# Altium PCB Tony's+Brew+Helper+2.0_PCB.pcbdoc
Units mil, origin at the board's own origin, x right, y up, seen from the top; angles counter-clockwise.
Board outline 176058.21 x 177280.51 mil, 2 copper layers (Top Layer, Bottom Layer); 78 components, 84 nets, 250 pads, 38 vias.
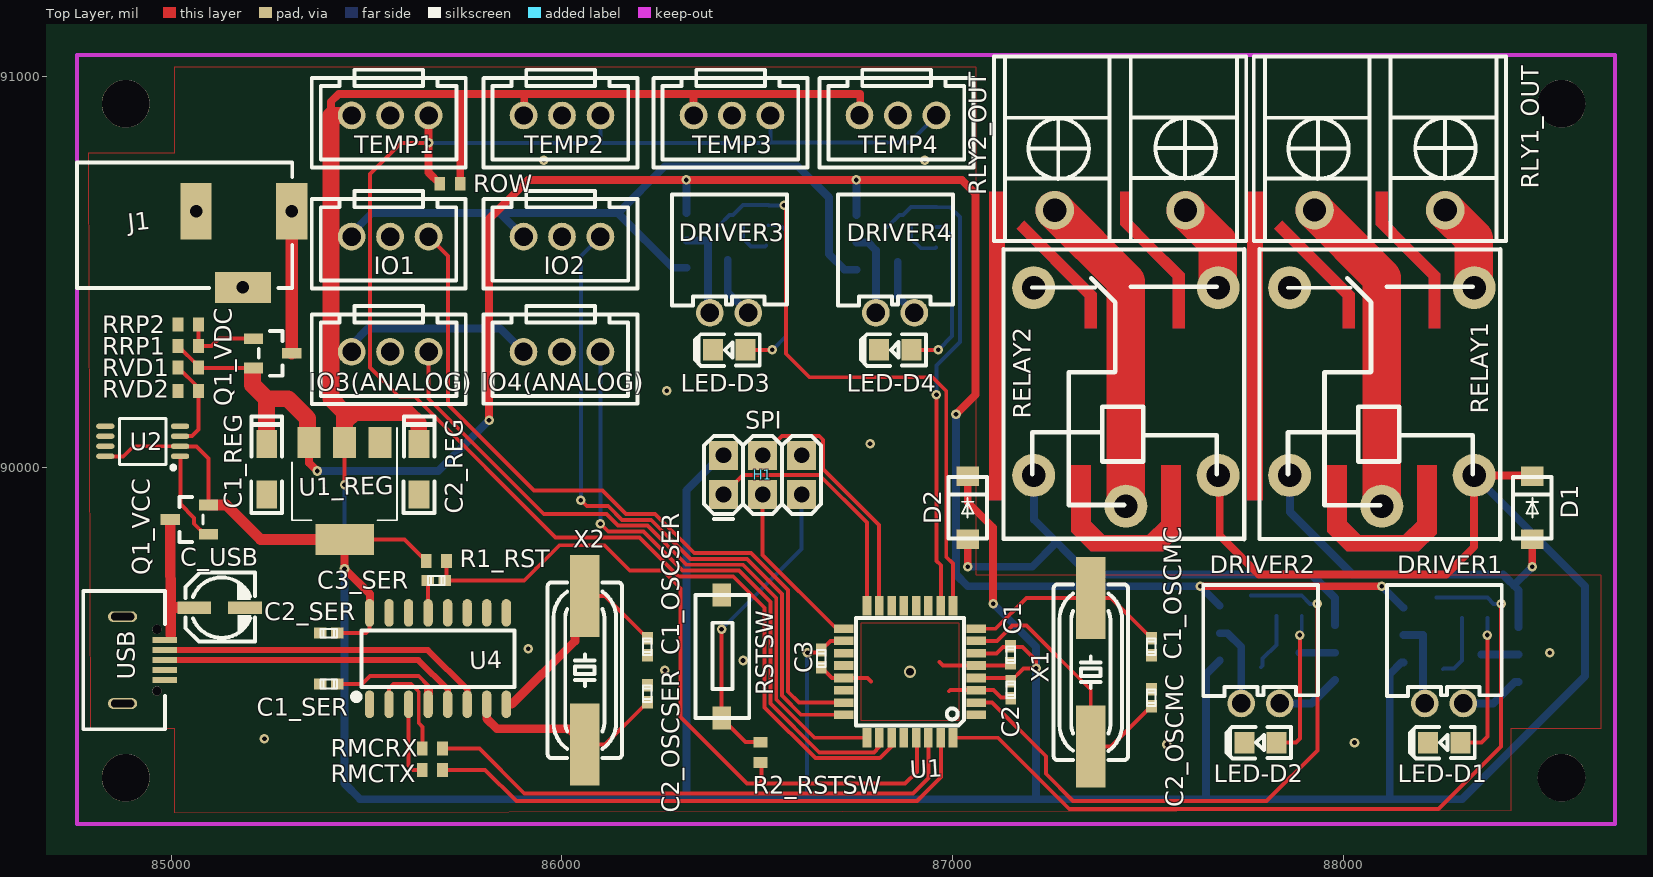
[diagram p0: Top Layer view]
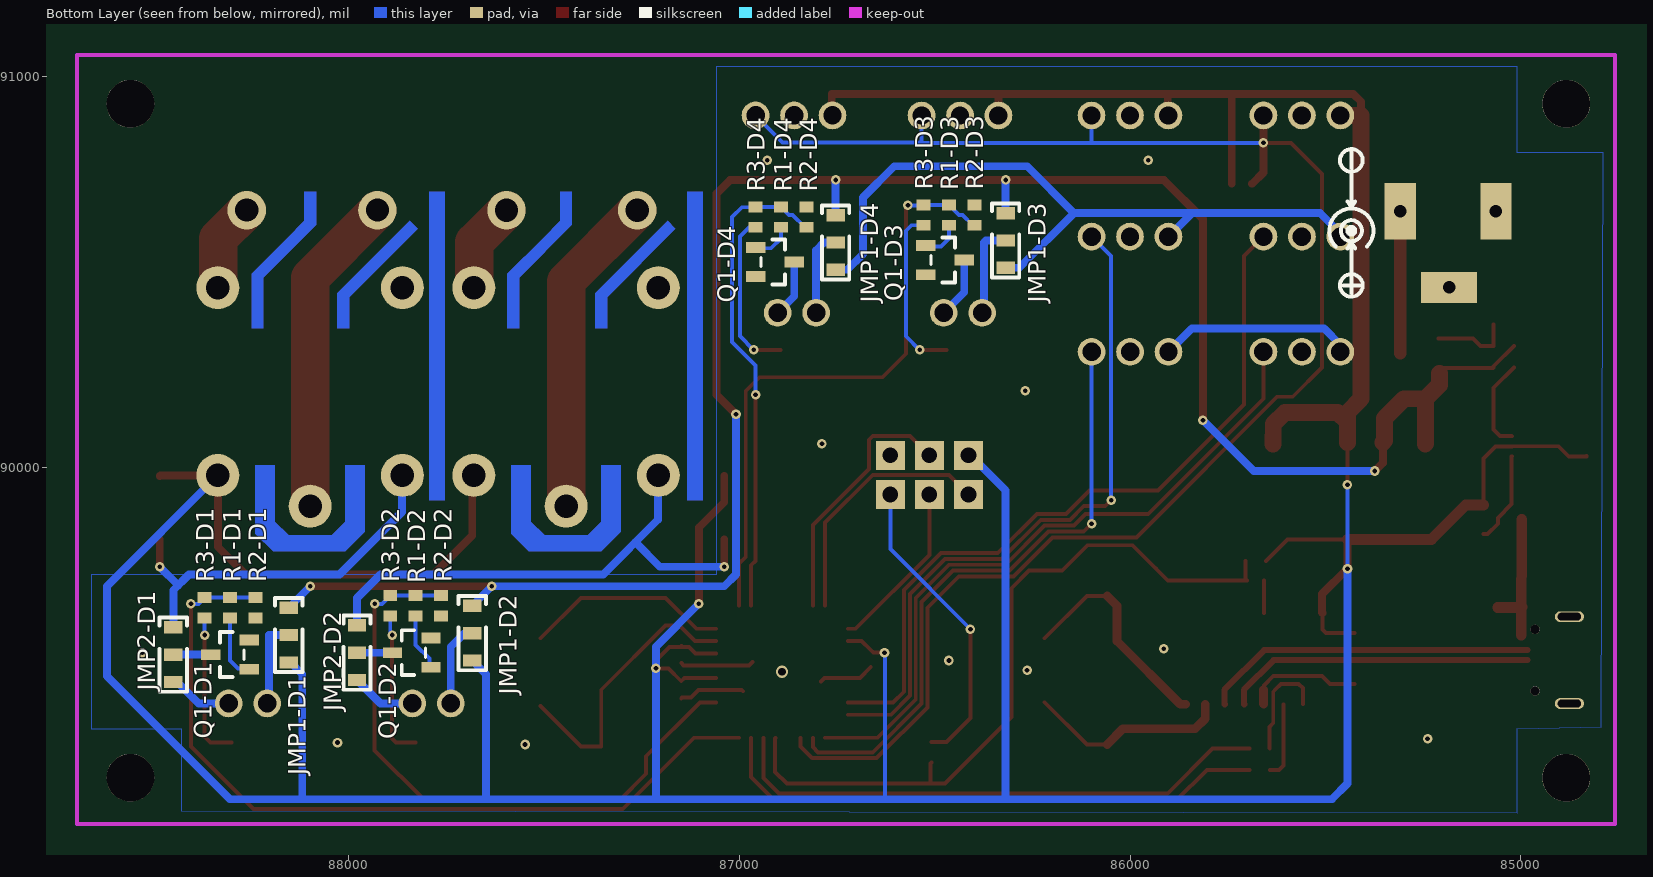
[diagram p1: Bottom Layer view, seen from below]

## Layer stack, top to bottom
Top Layer: signal copper (thickness not stored)
Dielectric: dielectric 12.6, FR-4, Dk 4.8
Bottom Layer: signal copper (thickness not stored)

## Board outline
177058.21,1000 1000,1000 1000,178280.51 177058.21,178280.51

## Components (designator, comment, footprint, x,y, rotation, side; value= is the part's Value field where it differs from the comment)
C1 "100n" 0402-CAP 87148.99,89520.36 r90 top
C1_OSCMC "22p" 0402-CAP 87508.99,89540.36 r90 top
C1_OSCSER "22p" 0402-CAP 86218.99,89540.36 r90 top
C1_REG "10u" CASE-A_3216#1 85243.99,89990.36 r90 top
C1_SER "10n" 0402-CAP 85403.99,89445.36 r0 top
C2 "100n" 0402-CAP 87149.07,89430.3 r90 top
C2_OSCMC "22p" 0402-CAP 87508.99,89410.36 r270 top
C2_OSCSER "22p" 0402-CAP 86219.07,89420.3 r270 top
C2_REG "22u" CASE-A_3216#2 85633.91,89990.42 r90 top
C2_SER "100n" 0402-CAP 85403.99,89575.36 r0 top
C3 "100n" 0402-CAP 86664.07,89510.3 r90 top
C3_SER "100n" 0402-CAP 85679.07,89710.3 r180 top
C_USB "10u" CAP-D4.0XH5.5 85059.47,89640.64 r180 top
D1 "M1" SMA(DO-214AC) 88484.07,89900.3 r90 top
D2 "M1" SMA(DO-214AC) 87038.99,89900.36 r90 top
DRIVER1 "AUX Driver 1" XH-2AW 88308.99,89495.36 r0 top
DRIVER2 "AUX Driver 2" XH-2AW 87838.99,89495.36 r0 top
DRIVER3 "AUX Driver 3" XH-2AW 86479.07,90495.3 r0 top
DRIVER4 "AUX Driver 4" XH-2AW 86903.99,90495.36 r0 top
H1 "SPI" 2X3 86413.99,89930.36 r0 top
IO1 "XHB-3A" XHB-3A 85558.99,90590.36 r180 top
IO2 "XHB-3A" XHB-3A 85999.07,90590.3 r180 top
IO3(ANALOG) "XHB-3A" XHB-3A 85559.07,90295.3 r180 top
IO4(ANALOG) "XHB-3A" XHB-3A 85998.99,90295.36 r180 top
J1 "DC-005" DCJ3P-14.2X11.0X9.0MM 85184.07,90655.3 r0 top
JMP1-D1 "AUX1 VCC - 12V" JMP-3-NO-0805 88153.99,89605.36 r90 bottom
JMP1-D2 "AUX2 VCC - 12V" JMP-3-NO-0805 87684.07,89610.3 r90 bottom
JMP1-D3 "AUX3 VCC - 12V" JMP-3-NO-0805 86318.99,90615.36 r90 bottom
JMP1-D4 "AUX4 VCC - 12V" JMP-3-NO-0805 86754.07,90610.3 r90 bottom
JMP2-D1 "AUX - RLY" JMP-3-NO-0805 88449.07,89555.3 r90 bottom
JMP2-D2 "AUX - RLY" JMP-3-NO-0805 87978.99,89560.36 r90 bottom
LED-D1 "17-21/BHC-XL2M2TY/3T" LED-0805 88258.99,89295.36 r0 top
LED-D2 "17-21/BHC-XL2M2TY/3T" LED-0805 87788.99,89295.36 r0 top
LED-D3 "17-21/BHC-XL2M2TY/3T" LED-0805 86429.07,90300.3 r0 top
LED-D4 "17-21/BHC-XL2M2TY/3T" LED-0805 86853.99,90300.36 r0 top
Q1-D1 "AO3404A" SOT-23(SOT-23-3)#1 88354.07,89520.3 r270 bottom
Q1-D2 "AO3404A" SOT-23(SOT-23-3)#1 87888.99,89525.36 r270 bottom
Q1-D3 "AO3404A" SOT-23(SOT-23-3)#1 86424.07,90530.3 r90 bottom
Q1-D4 "AO3404A" SOT-23(SOT-23-3)#1 86859.07,90525.3 r90 bottom
Q1_VCC "SI2301" SOT-23(SOT-23-3)#2 84996.87,89865.99 r90 top
Q1_VDC "AO3401" SOT-23(SOT-23-3)#3 85309.86,90291.66 r270 top
R1-D1 "100k" 0402-RES#1 88304.07,89640.3 r90 bottom
R1-D2 "100k" 0402-RES#1 87828.99,89645.36 r90 bottom
R1-D3 "100k" 0402-RES#1 86464.07,90645.3 r90 bottom
R1-D4 "100k" 0402-RES#1 86893.99,90640.36 r90 bottom
R1_RST "10k" 0402-RES#2 85678.99,89760.36 r180 top
R2-D1 "100k" 0402-RES#1 88239.07,89640.3 r90 bottom
R2-D2 "100k" 0402-RES#1 87763.99,89645.36 r90 bottom
R2-D3 "100k" 0402-RES#1 86398.99,90645.36 r270 bottom
R2-D4 "100k" 0402-RES#1 86828.99,90640.36 r270 bottom
R2_RSTSW "330R" 0402-RES#2 86508.99,89270.37 r90 top
R3-D1 "470R" 0402-RES#1 88368.99,89640.36 r90 bottom
R3-D2 "470R" 0402-RES#1 87893.99,89645.36 r90 bottom
R3-D3 "470R" 0402-RES#1 86528.99,90645.36 r90 bottom
R3-D4 "470R" 0402-RES#1 86958.99,90640.36 r90 bottom
RELAY1 "SRD-05VDC-SL-C00" RELAY-SL-SRD 88098.99,89900.36 r90 top
RELAY2 "SRD-05VDC-SL-C00" RELAY-SL-SRD 87443.91,89900.42 r90 top
RLY1_OUT "WJ8500-8.50-2P-14" WJ8500-8.50-2P-14 88093.99,90815.36 r0 top
RLY2_OUT "WJ8500-8.50-2P-14" WJ8500-8.50-2P-14 87429.07,90815.3 r0 top
RMCRX "1k" 0402-RES#2 85668.99,89280.37 r180 top
RMCTX "1k" 0402-RES#2 85668.99,89225.37 r180 top
ROW "4.7k" 0402-RES#2 85713.99,90725.36 r180 top
RRP1 "10k" 0402-RES#2 85043.99,90310.36 r0 top
RRP2 "10k" 0402-RES#2 85044.07,90365.3 r180 top
RSTSW "3x6x2.5mm" KEY-3.0*6.0 86409.07,89515.3 r90 top
RVD1 "8k" 0402-RES#2 85043.99,90255.36 r180 top
RVD2 "22k" 0402-RES#2 85043.99,90195.36 r180 top
TEMP1 "XHB-3A" XHB-3A 85559.07,90900.3 r180 top
TEMP2 "XHB-3A" XHB-3A 85999.15,90900.24 r180 top
TEMP3 "XHB-3A" XHB-3A 86434.15,90900.24 r180 top
TEMP4 "XHB-3A" XHB-3A 86858.99,90900.36 r180 top
U1 "ATMEGA 328P TQFP" TQFP-32 86891.32,89476.57 r180 top
U1_REG "AMS1117-5.0" SOT-223 85443.99,89815.36 r270 top
U2 "LM358D" VSSOP-8_3X3X065P 84996.93,90026.02 r180 top
U4 "CH340G" SOIC-16_150MIL 85684.07,89505.3 r0 top
USB "USB-Micro" USB-MICRO-1 84983.99,89455.36 r180 top
X1 "16MHZ" HC-49SMD 87353.99,89475.36 r270 top
X2 "12MHZ" HC-49SMD 86058.99,89480.36 r270 top

## Footprints (in the part's own frame and the unit in brackets; to place one, negate y for a bottom-side part, rotate by r counter-clockwise, add the part's x,y. Pads: shape width x height; smd on the part's side, far side on the other; paste and mask are expansions set on the pad)
2X3 [mil]
  rect 74x74 hole 40: 1(-0.01,0) 2(-0.01,100) 3(99.99,0) 4(99.99,100) 5(199.99,0) 6(199.99,100)
  silkscreen extent -50,-63 250,150
0402-CAP [mil]
  rect 32x27.9 smd: 1(21.9,-0.01) 2(-21.9,-0.01)
  silkscreen extent -21,-11 21,11
0402-RES#1 [mil]
  rect 27.6x35.4 smd: 1(26,0) 2(-26,0)
0402-RES#2 [mil]
  rect 27.6x35.4 smd: 1(-26,0) 2(26,0)
CAP-D4.0XH5.5 [mm]
  rect 2.2x0.8 smd: 1(-0.001,0.001) 2(-3.303,0.001)
  silkscreen extent -3.94,-2.29 0.56,2.21
CASE-A_3216#1 [mil]
  rect 71.5x53.5 smd: 1(69.05,-0.95) 2(-59.95,-0.95)
  silkscreen extent -107,-40 139,39
CASE-A_3216#2 [mil]
  rect 71.5x53.5 smd: 1(68.99,-1.03) 2(-60.01,-1.03)
  silkscreen extent -107,-40 139,39
DCJ3P-14.2X11.0X9.0MM [mil]
  rect 80x144 hole 32: +(125.02,-0.04) -1(-119.98,-0.04)
  rect 144x80 hole 32: -2(0.02,-195.04)
  silkscreen extent -425,-197 126,125
HC-49SMD [mil]
  rect 210x76 smd: 1(-190,-0.01) 2(190,-0.01)
  silkscreen extent -225,-95 225,95
JMP-3-NO-0805 [mil]
  rect 31.5x47.2 smd: 1(34.99,0.04) 2(-35.01,0.04) 3(-105.01,0.04)
  silkscreen extent -130,-35 60,35
KEY-3.0*6.0 [mm]
  rect 1.5x1.2 smd: 1(-4.002,-0.001) 2(3.999,-0.001)
  silkscreen extent -4,-1.8 4,1.7
LED-0805 [mil]
  rect 51.2x55.1 smd: 1(40.66,0.01) 2(-42.04,0.01)
  silkscreen extent -88,-41 78,40
RELAY-SL-SRD [mil]
  round 110 hole 60: 1(78.7,236.2) 2(559.1,236.2) 3(0,0) 4(78.7,-236.2) 5(559.1,-236.2)
  silkscreen extent -84,-303 658,313
SMA(DO-214AC) [mil]
  rect 50x57.9 smd: 1(-85.04,0.01) 2(76.96,0.01)
  silkscreen extent -82,-49 75,49
SOIC-16_150MIL [mm]
  oval 0.6x1.8 smd: 1(-4.47,-2.845) 2(-3.2,-2.845) 3(-1.93,-2.845) 4(-0.66,-2.845) 5(0.61,-2.845) 6(1.88,-2.845) 7(3.15,-2.845) 8(4.42,-2.845) 9(4.42,3.099) 10(3.15,3.099) 11(1.88,3.099) 12(0.61,3.099) 13(-0.66,3.099) 14(-1.93,3.099) 15(-3.2,3.099) 16(-4.47,3.099)
  silkscreen extent -5.53,-2.56 4.95,1.95
SOT-23(SOT-23-3)#1 [mm]
  rect 0.7x1.25 smd: 1(0.95,2.521) 2(-0.95,2.521) 3(0,0.021)
  silkscreen extent -1.46,0.62 1.46,2.17
SOT-23(SOT-23-3)#2 [mm]
  rect 0.7x1.25 smd: 1(-0.95,-2.52) 2(0.95,-2.52) 3(0,-0.021)
  silkscreen extent -1.46,-2.17 1.46,-0.62
SOT-23(SOT-23-3)#3 [mm]
  rect 0.7x1.25 smd: 1(-0.95,-2.519) 2(0.95,-2.519) 3(0,-0.019)
  silkscreen extent -1.46,-2.17 1.46,-0.62
SOT-223 [mm]
  rect 2x1.5 smd: 1(-6.299,2.301) 2(-6.299,0.001) 3(-6.299,-2.299)
  rect 2x3.8 smd: 4(0.001,0)
  silkscreen extent -7.25,-3.41 -1.24,3.41
TQFP-32 [mil]
  rect 50x22 smd: 1(-168.97,110) 2(-168.97,79) 3(-168.97,47) 4(-168.97,16) 5(-168.97,-16) 6(-168.97,-47) 7(-168.97,-79) 8(-168.97,-110) 17(169.03,-110) 18(169.03,-79) 19(169.03,-47) 20(169.03,-16) 21(169.03,16) 22(169.03,47) 23(169.03,79) 24(169.03,110)
  rect 22x50 smd: 9(-109.97,-169) 10(-78.97,-169) 11(-46.97,-169) 12(-15.97,-169) 13(16.03,-169) 14(47.03,-169) 15(79.03,-169) 16(110.03,-169) 25(110.03,169) 26(79.03,169) 27(47.03,169) 28(16.03,169) 29(-15.97,169) 30(-46.97,169) 31(-78.97,169) 32(-109.97,169)
  silkscreen extent -138,-138 138,138
USB-MICRO-1 [mm]
  round 0.6 hole 0.6: 0(0.514,0.711) 0(0.514,-3.302)
  oval 1.9x0.7 hole 0.5 slot 1.501 at 0 deg: 0(2.743,1.53) 0(2.743,-4.12)
  rect 1.6x0.4 smd: 1(0,-2.6) 2(0,-1.949) 3(0,-1.3) 4(0,-0.65) 5(0,0)
  silkscreen extent 0,-5.8 5.3,3.2
VSSOP-8_3X3X065P [mm]
  oval 1.2x0.34 smd: 1(-0.661,-0.051) 2(-0.661,-0.701) 3(-0.661,-1.351) 4(-0.661,-2.002) 5(4.191,-2.007) 6(4.191,-1.356) 7(4.191,-0.706) 8(4.191,-0.056)
  silkscreen extent -0.35,-2.52 3.28,0.81
WJ8500-8.50-2P-14 [mm]
  round 2.5 hole 1.5: 1(-4.249,-4) 2(4.249,-4)
  silkscreen extent -8.2,-6 8.2,6
XH-2AW [mm]
  round 1.8 hole 1.199: 1(-2.54,-2.54) 2(-0.038,-2.54)
  silkscreen extent -5,-2.06 2.46,5.16
XHB-3A [mm]
  round 1.8 hole 1.199: 1(-2.54,0) 2(-0.038,0) 3(2.461,0)
  silkscreen extent -4.96,-2.97 5.05,3.38

## Free pads (board coordinates)
  round 122.05 hole 122.05 unplated: ""(84884.07,89205.3) ""(84884.07,90930.3) ""(88558.98,89205.36) ""(88558.98,90930.36)

## Via types
v1: diameter 24.4, hole 12, Top Layer to Bottom Layer, 37 vias
v2: diameter 31.5, hole 19.69, Top Layer to Bottom Layer, 1 vias

## Nets (pads, with @x,y where several pads share a name; then routed paths per layer and width w, separated by ;. In a path a pad name is that pad's centre, name@x,y a point inside that pad or via, vN(x,y) a via of type N, cw(c..) or ccw(c..) an arc to the next point about the centre after c; other vN are vias at no path point)
D+: U4.5 USB.3 | length 794.1
  Top Layer w15.75: USB.3 85632.89,89506.46 85709.09,89430.26 85709.09,89394.26 U4.5
D-: U4.6 USB.2 | length 854.7
  Top Layer w15.75: USB.2@84983.99,89532.16 85657.29,89532.06 85759.09,89430.26 85759.09,89394.26 U4.6
DRIVER1: R1-D1.1 R2-D1.1 R3-D1.1 U1.32 | length 2081.1
  Top Layer w10: U1.32@87001.29,89307.66 87116.69,89307.66 87298.99,89125.36 87488.99,89125.36 88243.98,89125.36 88403.99,89285.37 v1(88403.98,89650.36)
  Bottom Layer w10: R2-D1.1 R1-D1.1 88368.93,89666.3 R3-D1.1 88384.99,89650.36 v1(88403.98,89650.36)
DRIVER1_1: DRIVER1.1 JMP1-D1.2 | length 227.1
  Bottom Layer w20: JMP1-D1.2 88203.99,89570.36 88203.99,89400.37 DRIVER1.1
DRIVER1_2: DRIVER1.2 JMP2-D1.3 | length 164.3
  Bottom Layer w20: DRIVER1.2 88383.99,89395.36 88438.93,89450.3 JMP2-D1.3
DRIVER2: R1-D2.1 R2-D2.1 R3-D2.1 U1.2 | length 1612.1
  Top Layer w10: U1.2@87060.29,89397.66 87101.69,89397.66 87238.99,89260.36 87238.99,89215.36 87308.99,89145.36 87478.99,89145.36 87803.98,89145.36 87933.99,89275.37 v1(87933.98,89650.36)
  Bottom Layer w10: R2-D2.1 R1-D2.1 R3-D2.1 87914.99,89650.36 v1(87933.98,89650.36)
DRIVER2_1: DRIVER2.1 JMP1-D2.2 | length 214.4
  Bottom Layer w20: JMP1-D2.2 87704.05,89575.3 87738.99,89540.36 DRIVER2.1
DRIVER2_2: DRIVER2.2 JMP2-D2.3 | length 166.4
  Bottom Layer w20: DRIVER2.2 87918.99,89395.36 JMP2-D2.3
DRIVER3: R1-D3.1 R2-D3.1 R3-D3.1 U1.9 | length 1580.3
  Top Layer w10: v1(86568.99,90670.36) 86573.99,90665.36 86573.99,90290.36 86633.99,90230.36 86948.99,90230.36 86983.99,90195.36 86983.99,89770.36 87001.27,89753.08 U1.9
  Bottom Layer w10: R2-D3.1 86402.99,90619.36 86428.99,90645.36 86438.13,90645.36 R1-D3.1 86528.93,90671.3 R3-D3.1 86529.99,90670.36 v1(86568.99,90670.36)
DRIVER3_1: DRIVER3.1 JMP1-D3.2 | length 239.2
  Bottom Layer w20: JMP1-D3.2 86368.99,90580.36 86373.99,90575.36 86373.99,90400.38 DRIVER3.1
DRIVER4: R1-D4.1 R2-D4.1 R3-D4.1 U1.10 | length 1246.6
  Top Layer w10: v1(86958.99,90185.36) 86958.99,89760.36 86970.27,89749.08 U1.10
  Bottom Layer w10: R2-D4.1 86832.99,90614.36 86863.99,90645.36 86872.99,90645.36 R1-D4.1 R3-D4.1 86959.99,90665.36 86993.99,90665.36 87018.99,90640.36 87018.99,90320.36 86958.99,90260.36 v1(86958.99,90185.36)
DRIVER4_1: DRIVER4.1 JMP1-D4.2 | length 218.2
  Bottom Layer w20: JMP1-D4.2 86784.05,90575.3 86803.99,90555.36 DRIVER4.1
GND: C1.2 C1_OSCMC.2 C1_OSCSER.2 C1_REG.2 C1_SER.2 C2.2 C2_OSCMC.2 C2_OSCSER.2 C2_REG.2 C2_SER.2 C3.2 C_USB.2 H1.6 IO1.2 IO2.2 IO3(ANALOG).2 IO4(ANALOG).2 J1.-1 LED-D1.2 LED-D2.2 LED-D3.2 LED-D4.2 Q1-D1.2 Q1-D2.2 Q1-D3.2 Q1-D4.2 R2-D1.2 R2-D2.2 R2-D3.2 R2-D4.2 RRP2.2 RSTSW.2 RVD2.2 TEMP1.2 TEMP2.2 TEMP3.2 TEMP4.2 U1.3 U1.5 U1.21 U1_REG.1 U2.4 U4.1 USB.5 | length 499.2
  Top Layer w10: C3.2 86691.86,89460.61 U1.21 ; U1.21 86782.39,89460.56 86791.39,89451.56 ; 86966.39,89501.56 86975.39,89492.56 U1.5@87060.39,89492.56 ; 86991.39,89426.56 86994.39,89429.56 U1.3@87060.39,89429.56 ; U1.3 87104.74,89429.61 87123.99,89410.36 87147.11,89410.36 C2.2 ; U1.5 87143.14,89492.61 C1.2
  other v1: 87548.98,89290.36 88028.98,89295.36 85238.99,89305.36 86263.99,89480.36 86463.99,89505.36 88528.98,89525.36 85913.99,89535.36 86788.99,90060.36 86268.99,90195.36 85953.99,90785.36 86928.99,90785.36
  other v2: 86891.32,89476.56
IO1: IO1.1 U1.23 | length 1932.3
  Top Layer w10: IO1.1 85708.99,90540.36 85708.99,90160.36 85928.99,89940.36 86103.99,89940.36 86108.99,89935.36 86163.99,89880.36 86238.99,89880.36 86338.99,89780.36 86483.99,89780.36 86578.99,89685.36 86578.99,89605.36 86578.99,89425.36 86606.79,89397.56 U1.23
IO2: IO2.1 U1.24 | length 1748.6
  Top Layer w10: v1(86048.99,89915.36) 86063.99,89900.36 86118.99,89900.36 86153.99,89865.36 86228.99,89865.36 86328.99,89765.36 86473.99,89765.36 86563.99,89675.36 86563.99,89605.36 86563.99,89415.36 86612.79,89366.56 U1.24
  Bottom Layer w10: v1(86048.99,89915.36) 86048.99,90540.22 IO2.1
IO3: IO3(ANALOG).1 U1.25 | length 1754
  Top Layer w10: 85659.07,90295.3 85658.99,90295.22 85658.99,90175.36 85953.99,89880.36 86113.99,89880.36 86143.99,89850.36 86218.99,89850.36 86318.99,89750.36 86463.99,89750.36 86548.99,89665.36 86548.99,89605.36 86548.99,89405.36 86646.79,89307.56 U1.25
IO4: IO4(ANALOG).1 U1.26 | length 1577.3
  Top Layer w10: v1(86098.99,89855.36) 86118.99,89835.36 86208.99,89835.36 86308.99,89735.36 86453.99,89735.36 86533.99,89655.36 86533.99,89605.36 86533.99,89395.36 86658.99,89270.36 86798.99,89270.36 86812.29,89283.66 U1.26
  Bottom Layer w10: v1(86098.99,89855.36) 86098.99,90295.36
J1_+: J1.+ Q1_VDC.3 | length 363.6
  Top Layer w31.5: Q1_VDC.3 J1.+
J1_-2: J1.-2
LED-D1_1: LED-D1.1 R3-D1.2 | length 379.5
  Top Layer w10: LED-D1.1@88299.69,89295.41 88299.74,89295.37 88353.99,89295.37 88368.99,89310.37 v1(88368.98,89570.36)
  Bottom Layer w10: v1(88368.98,89570.36) R3-D1.2
LED-D2_1: LED-D2.1 R3-D2.2 | length 379.5
  Top Layer w10: LED-D2.1 LED-D2.1 87878.99,89295.37 87888.99,89305.37 v1(87888.98,89570.36)
  Bottom Layer w10: v1(87888.98,89570.36) 87893.99,89575.36 R3-D2.2
LED-D3_1: LED-D3.1 R3-D3.2 | length 439.6
  Top Layer w10: LED-D3.1@86469.77,90300.35 86469.82,90300.3 v1(86539.07,90300.3)
  Bottom Layer w10: R3-D3.2 86559.99,90619.36 86573.99,90605.36 86573.99,90335.22 v1(86539.07,90300.3)
LED-D4_1: LED-D4.1 R3-D4.2 | length 423.8
  Top Layer w10: LED-D4.1 LED-D4.1 v1(86963.99,90300.36)
  Bottom Layer w10: R3-D4.2 86974.99,90614.36 86998.99,90590.36 86998.99,90335.36 v1(86963.99,90300.36)
MISO: H1.1 U1.16 | length 651.1
  Top Layer w10: H1.1 86463.98,89980.36 86658.99,89980.36 86781.27,89858.08 U1.16
MOSI: H1.4 U1.15 | length 664
  Top Layer w10: H1.4 86563.98,90080.36 86658.99,90080.36 86668.99,90070.36 86668.99,89995.36 86812.27,89852.08 U1.15
OW: ROW.2 TEMP1.1 TEMP2.1 TEMP3.1 TEMP4.1 U1.27 | length 4267.6
  Top Layer w10: v1(85659.07,90830.36) 85588.99,90830.36 85508.99,90750.36 85508.99,90690.36 85508.99,90255.36 85583.99,90180.36 85623.99,90180.36 85983.99,89820.36 86198.99,89820.36 86298.99,89720.36 86438.99,89720.36 86518.99,89640.36 86518.99,89605.36 86518.99,89385.36 86648.99,89255.36 86813.99,89255.36 86844.29,89285.66 U1.27
  Top Layer w20: TEMP1.1 v1(85659.07,90830.36) 85659.07,90754.28 ROW.2
  Bottom Layer w10: v1(85659.07,90830.36) 85883.99,90830.36 86533.5,90830.36 ; TEMP2.1 86099.15,90830.71 86099.5,90830.36 ; TEMP3.1 86534.15,90831.01 ; TEMP4.1 86889.64,90831.01 86534.15,90831.01 ; 86533.5,90830.36 86534.15,90831.01 ; 86533.5,90830.36 86534.15,90831.01
Q1-D1_1: Q1-D1.1 R1-D1.2 | length 167.4
  Bottom Layer w10: Q1-D1.1@88254.86,89482.9 88257.32,89485.36 88283.99,89485.36 88304.06,89505.44 R1-D1.2
Q1-D1_3: JMP2-D1.2 Q1-D1.3 | length 95.8
  Bottom Layer w20: Q1-D1.3@88353.26,89520.3 JMP2-D1.2
Q1-D2_1: Q1-D2.1 R1-D2.2 | length 147.6
  Bottom Layer w10: Q1-D2.1 87793.99,89492.16 87793.99,89510.36 87828.99,89545.36 R1-D2.2
Q1-D2_3: JMP2-D2.2 Q1-D2.3 | length 90.8
  Bottom Layer w20: Q1-D2.3 JMP2-D2.2
Q1-D3_1: Q1-D3.1 R1-D3.2 | length 102.4
  Bottom Layer w10: R1-D3.2 86464.07,90585.28 86483.99,90565.36 86520.93,90565.36 Q1-D3.1
Q1-D3_3: DRIVER3.2 Q1-D3.3 | length 156.8
  Bottom Layer w20: Q1-D3.3 86424.87,90448 DRIVER3.2
Q1-D4_1: Q1-D4.1 R1-D4.2 | length 104.6
  Bottom Layer w10: R1-D4.2 86893.99,90585.36 86918.99,90560.36 86955.93,90560.36 Q1-D4.1
Q1-D4_3: DRIVER4.2 Q1-D4.3 | length 147.6
  Bottom Layer w20: Q1-D4.3 86859.87,90437.98 DRIVER4.2
Q1_VDC_1: Q1_VDC.1 RRP1.2 RRP2.1 | length 203.4
  Top Layer w10: RRP2.1 85069.99,90365.23 RRP1.2 85103.99,90310.36 85122.69,90329.06 Q1_VDC.1
RELAY1_2: RELAY1.2
RELAY1_3: RELAY1.3 RLY1_OUT.1 | length 828.9
  Top Layer w98.42: RLY1_OUT.1 87926.69,90657.66 88098.99,90485.36 RELAY1.3
RELAY1_5: RELAY1.5 RLY1_OUT.2 | length 229.1
  Top Layer w98.42: RLY1_OUT.2 88261.49,90657.86 88333.99,90585.36 88333.99,90460.66 RELAY1.5
RELAY2_2: RELAY2.2
RELAY2_3: RELAY2.3 RLY2_OUT.1 | length 832.9
  Top Layer w98.42: RLY2_OUT.1 87261.77,90657.58 87443.99,90475.36 87443.99,89900.51 RELAY2.3
RELAY2_5: RELAY2.5 RLY2_OUT.2 | length 233.1
  Top Layer w98.42: RLY2_OUT.2 87596.55,90657.8 87678.99,90575.36 87678.99,90460.64 RELAY2.5
RLY1: D1.1 JMP2-D1.1 RELAY1.1 | length 994.5
  Top Layer w20: v1(88484.06,89745.3) D1.1
  Bottom Layer w20: RELAY1.1 87863.99,89977.86 87863.99,89885.36 88023.99,89725.36 88408.99,89725.36 88449.07,89685.29 JMP2-D1.1 ; 88436.8,89697.55 88484.07,89744.82 v1(88484.06,89745.3)
RLY2: D2.1 JMP2-D2.1 RELAY2.1 | length 1360.9
  Top Layer w20: v1(87038.99,89745.36) D2.1@87038.99,89815.36
  Bottom Layer w20: v1(87038.99,89745.36) 87203.99,89745.36 87265.88,89807.25 87265.88,89808.48 ; RELAY2.1 87208.99,89977.84 87208.99,89865.36 87348.99,89725.36 87918.99,89725.36 87978.98,89665.37 JMP2-D2.1
RST: H1.5 R2_RSTSW.2 RSTSW.1 | length 782.9
  Top Layer w10: v1(86408.99,89585.36) 86409.07,89585.28 RSTSW.1 86470.51,89296.37 R2_RSTSW.2
  Bottom Layer w10: v1(86408.99,89585.36) 86613.99,89790.36 H1.5
RST_RAW: C3_SER.2 R1_RST.1 R2_RSTSW.1 U1.29 | length 1901.1
  Top Layer w10: R1_RST.1 85704.99,89714.32 C3_SER.2 85903.94,89710.3 85935.97,89742.34 ; 85933.99,89740.36 85935.97,89742.34 ; R2_RSTSW.1 86511.07,89242.29 86511.07,89190.36 ; U1.29@86907.29,89307.36 86908.99,89306.36 86908.99,89220.36 86878.99,89190.36 86473.99,89190.36 86303.99,89360.36 86303.99,89690.36 86258.99,89735.36 86173.99,89735.36 86108.99,89800.36 85993.99,89800.36 85935.97,89742.34
RX_MC: RMCRX.1 U1.30 | length 1410.1
  Top Layer w10: RMCRX.1 85708.99,89280.36 85788.99,89280.36 85903.99,89165.36 86898.99,89165.36 86938.29,89204.66 U1.30
S$18: 
S$20: 
S$22: 
S$2193: 
SCK: H1.3 U1.17 | length 441.5
  Top Layer w10: H1.3 86513.99,89775.36 86702.74,89586.61 U1.17
TX_MC: RMCTX.1 U1.31 | length 1434.7
  Top Layer w10: RMCTX.1 85803.99,89225.36 85883.99,89145.36 86908.99,89145.36 86970.29,89206.66 U1.31
U1_1: U1.1
U1_11: U1.11
U1_12: U1.12
U1_13: U1.13
U1_14: U1.14
U1_19: U1.19
U1_20: U1.20
U1_22: U1.22
U1_28: U1.28
U2_1: Q1_VCC.1 U2.1 | length 235.8
  Top Layer w10: U2.1 85023.99,90026.96 85023.99,89905.36 85058.99,89870.36 85058.99,89855.36 85085.74,89828.61 Q1_VCC.1
U2_3: RVD1.2 RVD2.1 U2.3 | length 234.7
  Top Layer w10: RVD1.2 85069.99,90203.36 RVD2.1 85069.99,90096.36 85053.99,90080.36 85024.08,90080.36 U2.3
U2_5: U2.5
U2_6: U2.6
U2_7: U2.7
U4_2: RMCRX.2 U4.2 | length 279.4
  Top Layer w10: U4.2 85558.07,89434.45 85568.99,89445.36 85613.99,89445.36 85628.99,89430.36 85633.99,89425.36 85633.99,89345.36 85643.99,89335.36 85643.99,89281.37 RMCRX.2
U4_3: RMCTX.2 U4.3 | length 196.5
  Top Layer w10: U4.3 85608.07,89236.28 85618.99,89225.37 RMCTX.2
U4_4: C1_SER.1 U4.4 | length 335.9
  Top Layer w10: C1_SER.1 85488.99,89445.36 85508.99,89465.36 85633.99,89465.36 85658.09,89441.26 U4.4
  Top Layer w22.01: U4.4 85658.99,89394.26 85658.99,89430.36
U4_7: C2_OSCSER.1 U4.7 X2.2 | length 520
  Top Layer w10: X2.2 86111.03,89290.36 C2_OSCSER.1
  Top Layer w22.01: U4.7 85808.09,89356.26 85833.99,89330.36 86018.99,89330.36 X2.2
U4_8: C1_OSCSER.1 U4.8 X2.1 | length 573.2
  Top Layer w10: X2.1 86110.89,89670.36 C1_OSCSER.1
  Top Layer w22.01: U4.8 85871.89,89393.26 86033.99,89555.36 86033.99,89645.36 X2.1
U4_9: U4.9
U4_10: U4.10
U4_11: U4.11
U4_12: U4.12
U4_13: C3_SER.1 U4.13 | length 83.4
  Top Layer w10: C3_SER.1 85658.09,89709.38 U4.13
U4_14: U4.14
U4_15: U4.15
USB_4: USB.4
USBVCC: C_USB.1 Q1_VCC.3 USB.1 | length 358.7
  Top Layer w27.56: 84997.09,89642.36 84998.79,89640.66 C_USB.1@85059.49,89640.66 ; Q1_VCC.3 84998.99,89570.36
VCC: C1.1 C2.1 C2_REG.1 C2_SER.1 C3.1 D1.2 D2.2 H1.2 IO1.3 IO2.3 IO3(ANALOG).3 IO4(ANALOG).3 JMP1-D1.3 JMP1-D2.3 JMP1-D3.3 JMP1-D4.3 Q1_VCC.2 R1_RST.2 RELAY1.4 RELAY2.4 ROW.1 TEMP1.3 TEMP2.3 TEMP3.3 TEMP4.3 U1.4 U1.6 U1.18 U1_REG.2 U1_REG.4 U2.2 U2.8 U4.16 | length 16213.4
  Top Layer w10: U2.8@84831.89,90028.26 84832.49,90027.66 84877.59,90027.66 84903.59,90053.66 85022.89,90053.66 85023.29,90053.26 85064.99,90053.26 85096.09,90022.16 Q1_VCC.2 ; C2_SER.1 85498.99,89575.36 85508.07,89584.45 U4.16 ; U1_REG.4@85443.94,89815.34 85598.01,89815.34 R1_RST.2 ; v1(85443.99,89955.36) U1_REG.2 ; v1(86628.99,89525.36) 86657.23,89525.36 C3.1 86687.48,89555.61 U1.18 ; U1.4 87140.66,89460.61 C2.1 87182.23,89485.36 v1(87213.99,89485.36) 87213.99,89505.36 87178.99,89540.36 87150.89,89540.36 C1.1 87147.09,89540.36 87128.99,89540.36 87112.24,89523.61 U1.6
  Top Layer w20: 85408.99,90900.36 85408.99,90935.36 85428.99,90955.36 85903.99,90955.36 ; U1_REG.4@85443.94,89815.34 v1(85443.94,89740.41) 85443.99,89740.36 85508.99,89675.36 85508.99,89628.22 U4.16 ; ROW.1 85739.99,90953.62 85741.73,90955.36 ; TEMP2.3@85902.29,90900.26 85903.99,90901.96 85903.99,90955.36 ; TEMP3.3@86337.27,90900.26 86337.27,90955.36 ; TEMP4.3 86763.99,90902.26 86763.99,90955.36 85903.99,90955.36 ; D2.2@87038.99,89977.36 87038.99,89910.36 87103.99,89845.36 v1(87103.99,89650.36) ; RELAY2.4 87683.99,89975.24 87683.99,89825.36 87783.99,89725.36 88263.99,89725.36 88335.19,89796.56 RELAY1.4 88482.31,89979.06 D1.2
  Top Layer w27.56: Q1_VCC.2 85140.99,89903.36 85228.99,89815.36 U1_REG.4@85443.92,89815.36
  Top Layer w43.31: U1_REG.2 85443.99,90140.36 85408.99,90175.36 85408.99,90900.36 TEMP1.3 ; U1_REG.2 85443.99,90115.36 85468.99,90140.36 85603.99,90140.36 85633.99,90110.36 C2_REG.1@85634.9,90059.46
  Bottom Layer w10: v1(85443.94,89740.41) 85443.99,89740.46 v1(85443.99,89955.36) ; 86627.32,89150.37 86627.32,89523.7 v1(86628.99,89525.36)
  Bottom Layer w20: v1(85443.94,89740.41) 85443.94,89190.41 85483.99,89150.37 88303.99,89150.37 88618.99,89465.36 88618.99,89695.26 RELAY1.4 ; IO1.3 85462.09,90598.46 85513.99,90650.36 85842.11,90650.36 ; 85462.17,90295.3 85462.17,90313.54 85503.99,90355.36 85842.09,90355.36 85902.09,90295.36 ; IO2.3 85842.11,90650.36 ; 86316.38,89150.37 86318.99,89152.98 86318.99,89940.36 86408.99,90030.37 H1.2 ; JMP1-D3.3 86283.99,90510.36 86143.99,90650.36 ; JMP1-D4.3 86754.01,90505.36 86723.99,90505.36 86683.99,90545.36 86683.99,90690.36 86603.99,90770.36 86263.99,90770.36 86143.99,90650.36 ; v1(87103.99,89650.36) 87213.99,89540.36 v1(87213.99,89485.36) 87214.15,89485.2 87214.15,89150.37 ; 87649.37,89150.37 87648.99,89150.75 87648.99,89470.36 87683.93,89505.3 JMP1-D2.3 ; 88120.37,89150.37 88118.99,89151.75 88118.99,89470.36 88148.99,89500.36 JMP1-D1.3 ; 85842.11,90650.36 86143.99,90650.36
VDC: C1_REG.1 JMP1-D1.1 JMP1-D2.1 JMP1-D3.1 JMP1-D4.1 Q1_VDC.2 RRP1.1 RVD1.1 U1_REG.3 | length 5416.2
  Top Layer w10: RRP1.1 85069.99,90258.36 RVD1.1 85071.1,90254.26 Q1_VDC.2
  Top Layer w20: U1_REG.3@85353.44,90063.39 85353.44,90010.91 v1(85373.99,89990.36) ; v1(85813.99,90120.36) 85813.99,90635.36 85913.99,90735.36 v1(86318.99,90735.36) 86754.07,90735.36 v1(86754.07,90735.3) 87024.05,90735.3 87058.99,90700.36 87058.99,90195.36 87058.99,90185.36 v1(87008.99,90135.36) ; v1(87634,89695.36) v1(88098.98,89695.36)
  Top Layer w43.31: 85208.99,90240.36 85208.99,90210.36 85243.99,90175.36 ; C1_REG.1@85244.99,90059.36 85243.99,90060.36 85243.99,90175.36 ; U1_REG.3@85353.44,90063.39 85348.99,90067.84 85348.99,90125.36 85298.99,90175.36 85243.99,90175.36
  Bottom Layer w20: v1(85373.99,89990.36) 85683.99,89990.36 v1(85813.99,90120.36) ; JMP1-D3.1 v1(86318.99,90735.36) ; JMP1-D4.1 v1(86754.07,90735.3) ; v1(87008.99,90135.36) 87008.99,89725.36 87038.99,89695.36 v1(87634,89695.36) JMP1-D2.1 ; v1(88098.98,89695.36) JMP1-D1.1
XTAL1: C2_OSCMC.1 U1.7 X1.2 | length 721.3
  Top Layer w10: U1.7 87114.24,89555.61 87153.99,89595.36 87188.99,89595.36 87353.99,89430.36 X1.2 87354.04,89285.32 87405.84,89285.32 C2_OSCMC.1
XTAL2: C1_OSCMC.1 U1.8 X1.1 | length 524
  Top Layer w10: U1.8 87110.24,89586.61 87188.99,89665.36 X1.1 87354.04,89665.32 87405.93,89665.32 C1_OSCMC.1
pads on no net: USB.0

## Polygon pours and split planes (outlines as drawn)
GND on Bottom Layer (solid): 84788.99,90805.36 85008.99,90805.36 85008.99,91025.36 87058.99,91025.36 87058.99,89725.36 88658.99,89725.36 88658.99,89330.36 88428.99,89330.36 88428.99,89120.37 85008.99,89115.37 85008.99,89330.36 84793.99,89335.36 84788.99,90805.36
GND on Top Layer (solid): 87016.32,89351.56 86766.32,89351.56 86766.32,89601.56 87016.32,89601.56 87016.32,89351.56
GND on Top Layer (solid): 85008.99,91025.36 87058.99,91025.36 87058.99,89725.36 88658.99,89725.36 88658.99,89330.36 88428.99,89330.36 88428.99,89120.37 85008.99,89115.37 85008.99,89330.36 84793.99,89330.36 84788.99,90805.36 85008.99,90805.36

## Other copper
Multi-Layer:
  region: 87353.99,90005.36 87354.07,89860.3 87389.07,89825.3 87499.07,89825.3 87534.07,89860.3 87533.98,90005.36 87558.99,90005.36 87583.98,90005.36 87584.07,89830.3 87539.07,89785.3 87354.07,89785.3 87303.99,89835.36 87303.99,90005.36 87313.99,90005.36
  region: 88008.96,90005.39 88009.03,89860.33 88044.03,89825.33 88154.03,89825.33 88189.03,89860.33 88188.95,90005.39 88213.95,90005.39 88238.95,90005.39 88239.03,89830.33 88194.03,89785.33 88009.03,89785.33 87958.95,89835.39 87958.96,90005.39 87968.96,90005.39
  region: 87133.99,90705.36 87133.99,89915.36 87093.99,89915.36 87093.99,90705.36
  region: 87794.07,90705.3 87794.07,89915.3 87754.07,89915.3 87754.07,90705.3
  region: 87183.99,90630.36 87368.99,90445.36 87368.99,90355.36 87338.99,90355.36 87338.99,90435.36 87163.99,90610.36
  region: 87843.99,90630.36 88028.99,90445.36 88028.99,90355.36 87998.99,90355.36 87998.99,90435.36 87823.99,90610.36
  region: 87458.99,90705.36 87458.99,90630.36 87503.99,90585.36 87594.07,90495.3 87594.07,90355.3 87564.07,90355.3 87564.07,90485.3 87428.99,90620.36 87428.99,90705.36
  region: 88113.95,90705.39 88113.94,90630.39 88158.94,90585.39 88249.03,90495.33 88249.02,90355.33 88219.02,90355.33 88219.03,90485.33 88083.98,90620.36 88083.98,90705.36

## Text inside footprints (layer, text, board x,y; h text height)
JMP1-D1: Document "1" at 88178.98,89650.36 h30 r90; Document "2" at 88178.98,89580.1 h30 r89; Document "3" at 88178.71,89507.5 h30 r79
JMP1-D2: Document "1" at 87709.06,89655.3 h30 r90; Document "2" at 87709.06,89585.04 h30 r89; Document "3" at 87708.79,89512.44 h30 r79
JMP1-D3: Document "1" at 86313.99,90520.36 h30 r270; Document "2" at 86314,90590.62 h30 r269; Document "3" at 86314.27,90663.22 h30 r259
JMP1-D4: Document "1" at 86779.07,90655.3 h30 r90; Document "2" at 86779.07,90585.04 h30 r89; Document "3" at 86778.8,90512.44 h30 r79
JMP2-D1: Document "1" at 88474.06,89600.3 h30 r90; Document "2" at 88474.06,89530.04 h30 r89; Document "3" at 88473.79,89457.44 h30 r79
JMP2-D2: Document "1" at 88003.98,89605.36 h30 r90; Document "2" at 88003.98,89535.1 h30 r89; Document "3" at 88003.71,89462.5 h30 r79